# Altium PCB 2023-02-24_PIFHomework_DigitalClock_ThangHo_V1-01.PcbDoc
Units mil, origin at the board's own origin, x right, y up, seen from the top; angles counter-clockwise.
Board outline 5390 x 3175 mil, 2 copper layers (Top Layer, Bottom Layer); 9 components, 19 nets, 85 pads, 0 vias.
Unrouted connection lines stored in the file: 1.
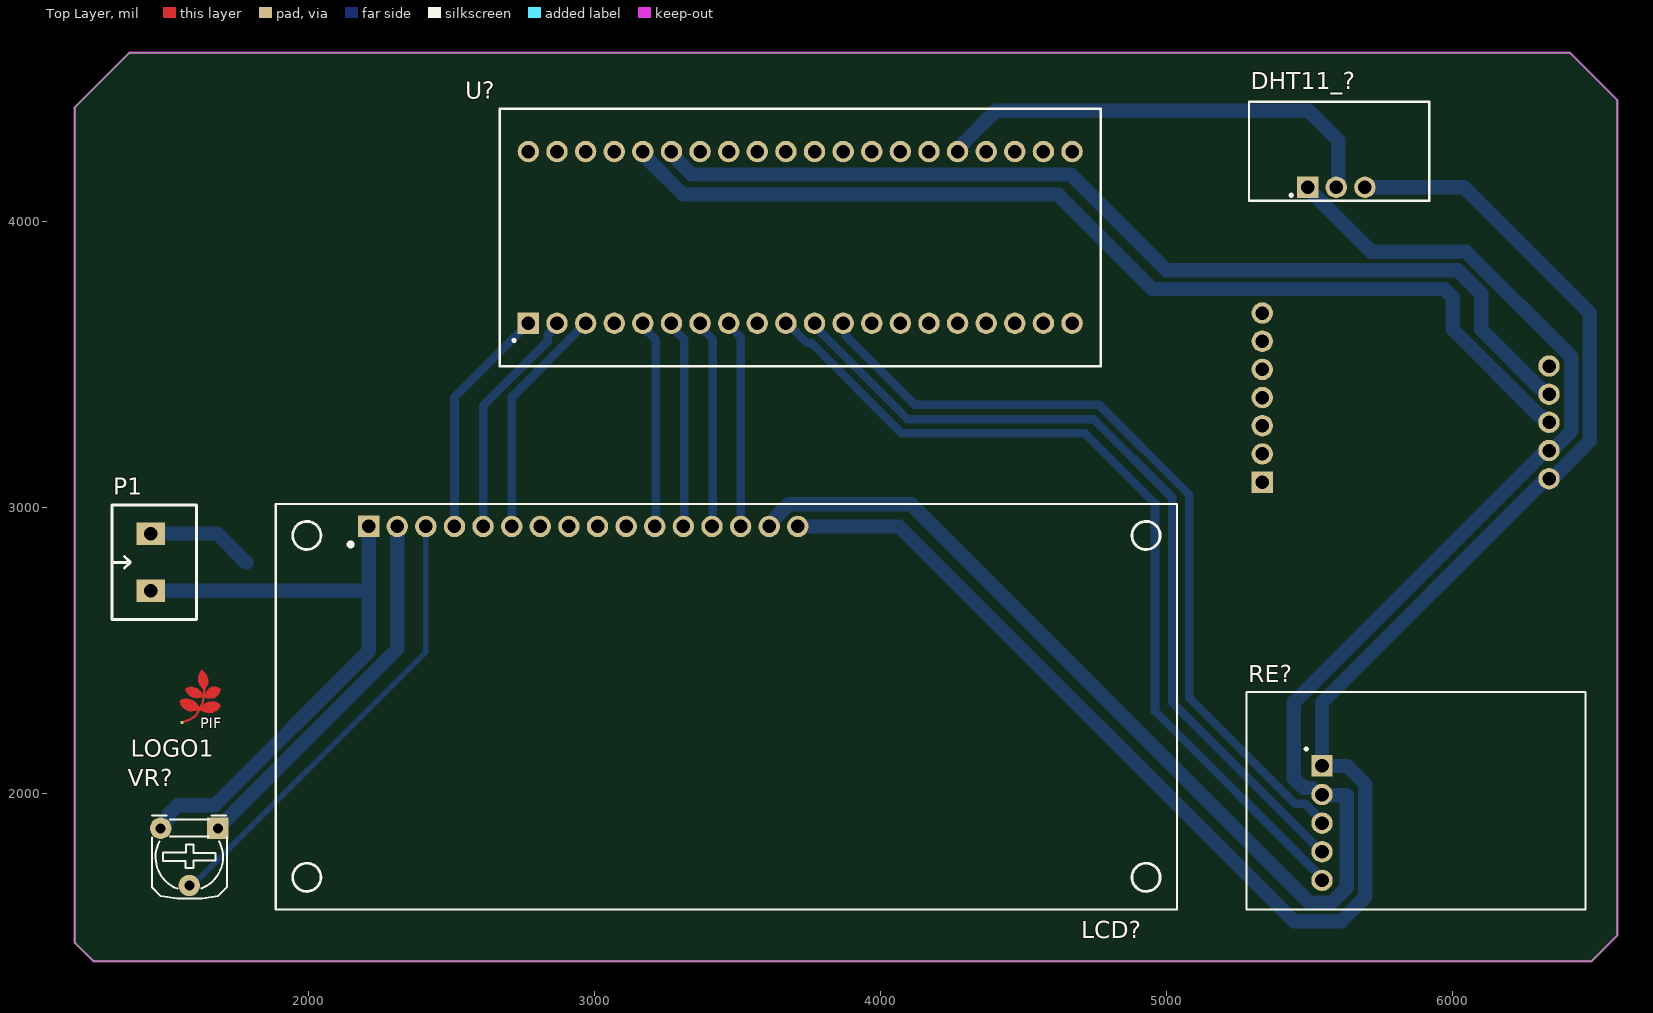
[diagram p0: Top Layer view]
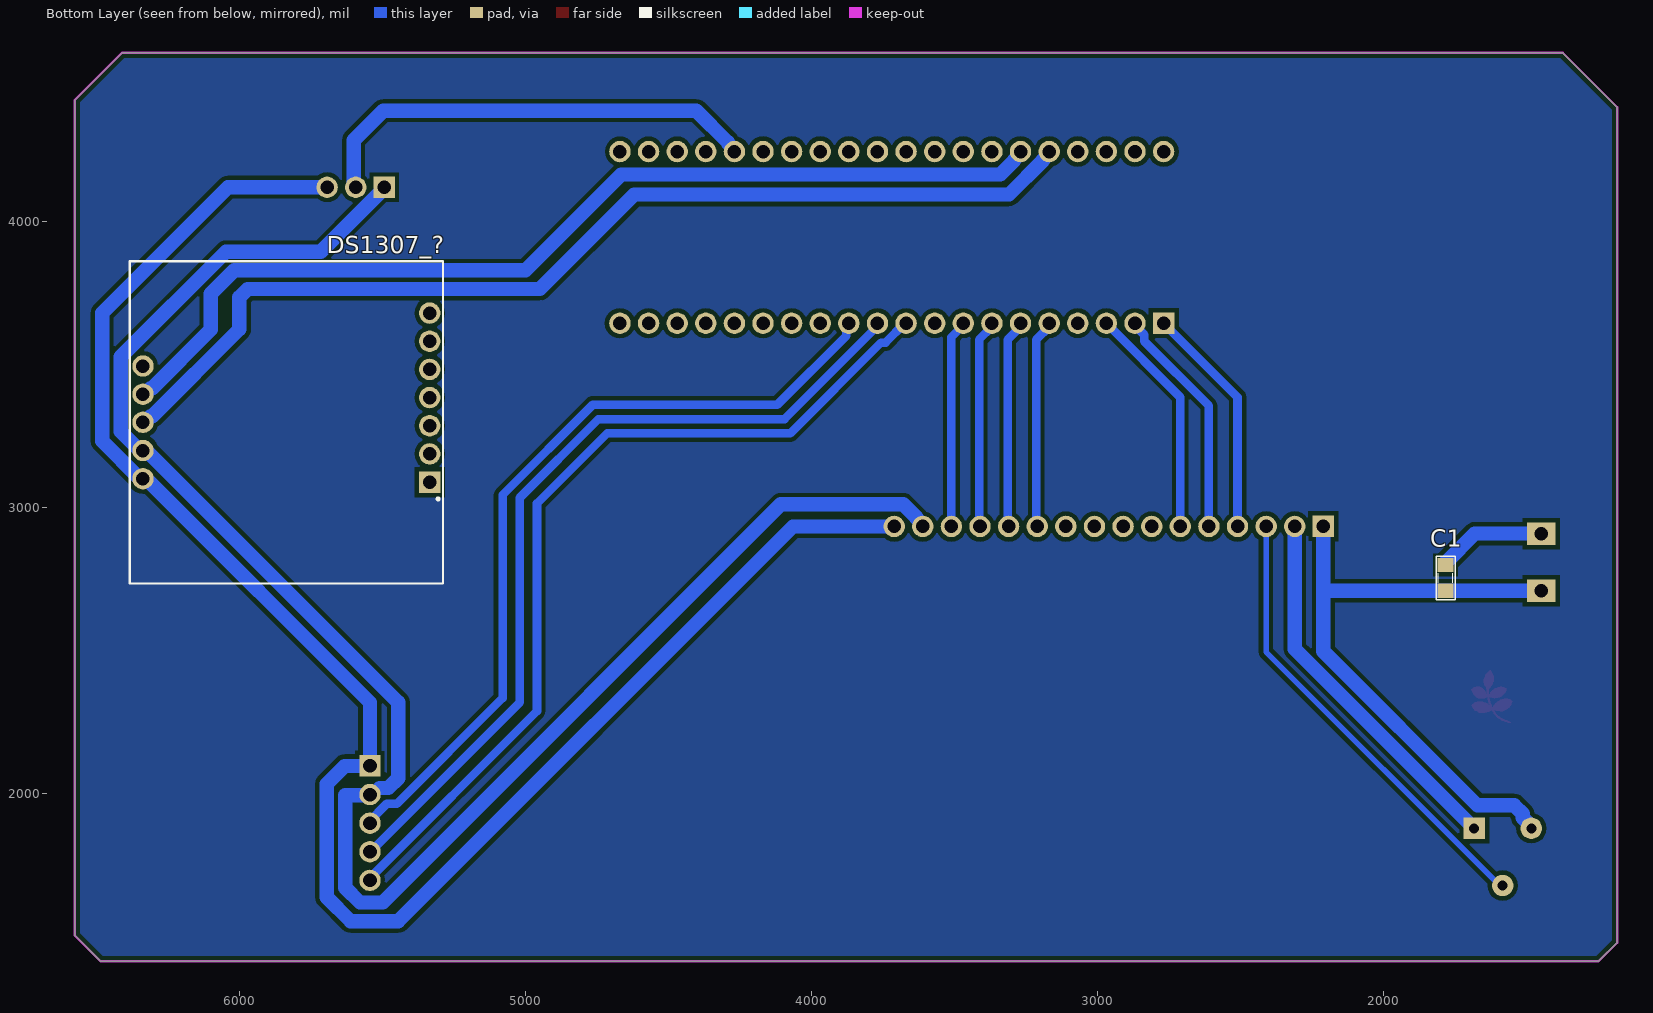
[diagram p1: Bottom Layer view, seen from below]
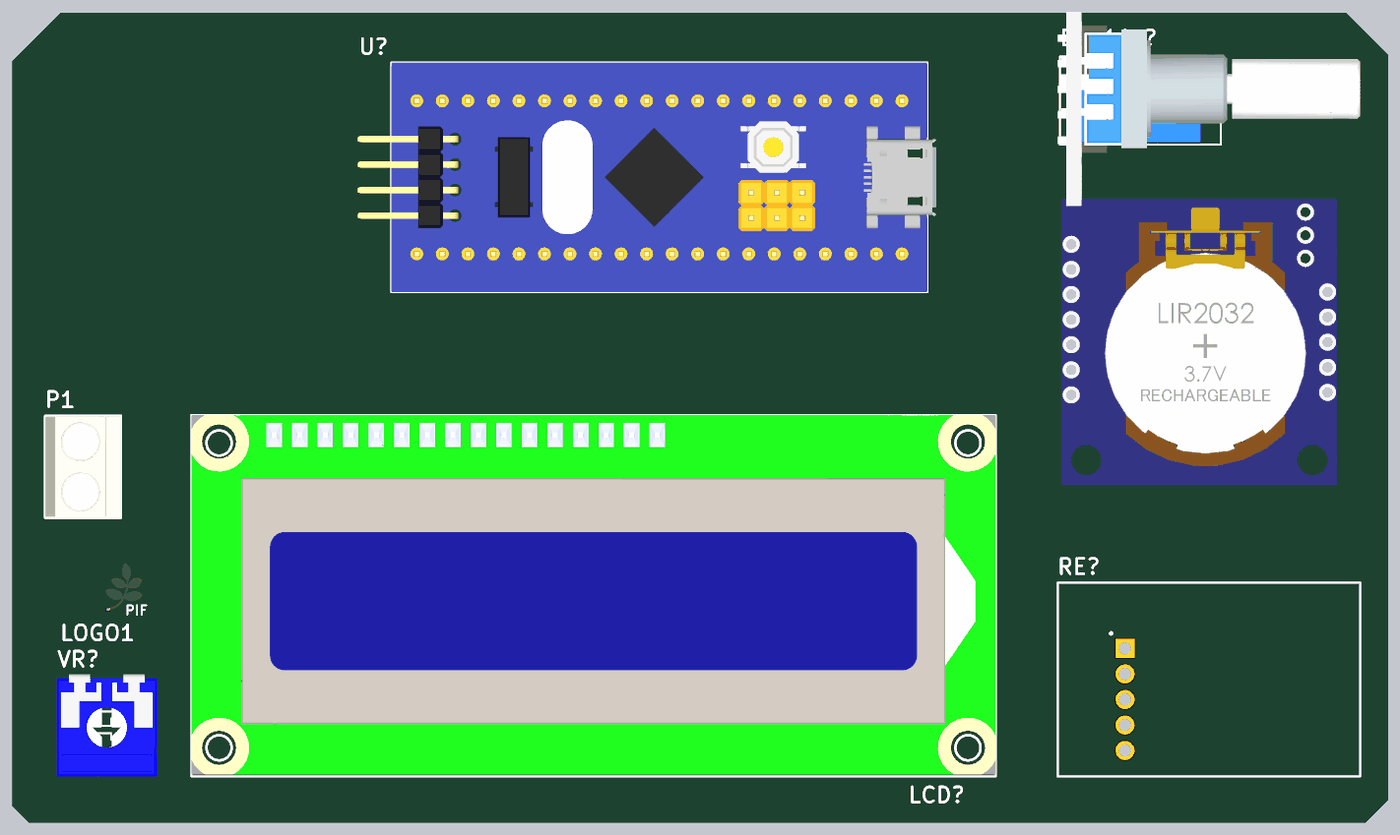
[diagram p2: 3D render of the assembled board from above, using the file's embedded part models]

## Layer stack, top to bottom
Top Solder: solder mask 0.4, Solder Resist, Dk 3.5
Top Layer: signal copper 1.4
Dielectric 1: dielectric 12.6, FR-4, Dk 4.8
Bottom Layer: signal copper 1.4
Bottom Solder: solder mask 0.4, Solder Resist, Dk 3.5

## Board outline
1250,1415 1185,1480 1185,4400 1375,4590 6410,4590 6575,4425 6575,1505 6485,1415

## Design rules (kind name [scope] priority, off if disabled: settings)
Clearance [All] p1: gap=15 ignorepadtopadclearanceinfootprint=FALSE
PolygonConnect [All] p1: connectstyle=Relief reliefconductorwidth=10 reliefentries=4 polygonreliefangle="90 Angle" airgapwidth=10
RoutingVias [All] p1: holewidth=31.5 width=59.06 viastyle="Through Hole" minholewidth=31.5 minwidth=59.06 maxholewidth=31.5 maxwidth=59.06
SolderMaskExpansion [All] p1: expansion=4 istentingtop=FALSE
Width [All] p1: maxlimit=50 minlimit=20 preferedwidth=30
30 further rules are at their usual default settings.

## Components (designator, comment, footprint, x,y, rotation, side; value= is the part's Value field where it differs from the comment)
C1 "Cap Non-Pol SMD" CAP-SM-0805 1785,2710 r90 bottom value=1uF
DHT11_? "N/A" DHT11 5589.53,4120 r0 top
DS1307_? "N/A" DS1307 5835.98,3385.28 r90 bottom
LCD? "N/A" LCD1602 1887.27,3013.74 r0 top
LOGO1 "LOGO PIF" "PIF LOGO SMALL TOP" 1750,2439 r0 top
P1 "Domino 2" "DOMINO 2- 5mm" 1450,2810 r90 top
RE? "N/A" Rotary_Encoder 5890,1972.4 r270 top
U? "Bluepill" STM32F103C8T6 3720,3945 r0 top
VR? "10K" "Varistor 1" 1685,1880 r180 top value="VR 10K"

## Footprints (in the part's own frame and the unit in brackets; to place one, negate y for a bottom-side part, rotate by r counter-clockwise, add the part's x,y. Pads: shape width x height; smd on the part's side, far side on the other; paste and mask are expansions set on the pad)
CAP-SM-0805 [mil]
  rect 50x55 smd: 1(0,0) 2(90,0)
  silkscreen extent -32,-34 121,33, body extent 6,-25 84,25, height 31
DHT11 [mm]
  rect 1.9x1.9 hole 1.2: 1(-2.44,0)
  round 1.9 hole 1.2: 2(0.1,0) 3(2.64,0)
  silkscreen extent -7.64,-1.2 8.36,7.6, body extent -7.64,-0.95 8.36,7.55, height 4.61
"DOMINO 2- 5mm" [mm]
  rect 2x2.5 hole 1.2: 1(-2.54,0) 2(2.54,0)
  silkscreen extent -5.08,-4.08 5.08,3.43, body extent -5,-4.07 5,3.43, height 10
DS1307 [mm]
  rect 1.9x1.9 hole 1.2: 1(-7.5,-12.725)
  round 1.9 hole 1.2: 2(-5,-12.725) 3(-2.5,-12.725) 4(0,-12.725) 5(2.5,-12.725) 6(5,-12.725) 7(7.5,-12.725) 8(2.8,12.725) 9(0.3,12.725) 10(-2.2,12.725) 11(-4.7,12.725) 12(-7.2,12.725) 12(-7.2,12.725)
  silkscreen extent -16.5,-13.9 12.1,13.9, body extent -16.45,-13.77 12.05,13.73, height 2.59
LCD1602 [mm]
  rect 1.9x1.9 hole 1.2: 1(8.24,-2)
  round 1.9 hole 1.2: 2(10.78,-2) 3(13.32,-2) 4(15.86,-2) 5(18.4,-2) 6(20.94,-2) 7(23.48,-2) 8(26.02,-2) 9(28.56,-2) 10(31.1,-2) 11(33.64,-2) 12(36.18,-2) 13(38.72,-2) 14(41.26,-2) 15(43.8,-2) 16(46.34,-2)
  silkscreen extent 0,-36 80,0, body extent 0,-35.8 80,0, height 11.4
"PIF LOGO SMALL TOP" [mil]
  rect 10x10 smd: 1(-190,-189)
  Top Layer region: -76.29,-64.08 -76.23,-64.06 -71.49,-64.7 -71.45,-64.72 -71.4,-64.72 -66.34,-66.32 -66.33,-66.32 -66.33,-66.32 -61.56,-67.89 -61.49,-67.95 -61.4,-67.97 -55.7,-72.41 -55.64,-72.52 -55.55,-72.6 -55.54,-72.69 -55.5,-72.77 -55.53,-72.89 -55.52,-73.01 -57.42,-78.41 -57.44,-78.43 -57.44,-78.45 -60.94,-86.68 -60.96,-86.71 -60.97,-86.75 -62.87,-89.91 -62.87,-89.91 -62.87,-89.92 -65.41,-94.02 -65.46,-94.06 -65.49,-94.12 -72.46,-100.79 -72.53,-100.82 -72.58,-100.88 -78.58,-104.05 -78.63,-104.05 -78.66,-104.08 -82.46,-105.35 -82.55,-105.34 -82.63,-105.37 -93.4,-105.37 -93.43,-105.36 -93.46,-105.37 -98.86,-104.74 -98.87,-104.73 -98.88,-104.74 -103.31,-104.1 -103.37,-104.07 -103.44,-104.07 -107.24,-102.47 -107.26,-102.44 -107.29,-102.44 -110.76,-100.54 -110.81,-100.48 -110.88,-100.45 -110.93,-100.32 -111.02,-100.22 -111.01,-100.14 -111.04,-100.07 -111.04,-93.43 -111,-93.33 -111,-93.22 -106.56,-83.08 -106.53,-83.05 -106.52,-83.01 -100.82,-74.14 -100.75,-74.09 -100.71,-74.02 -97.24,-71.15 -97.21,-71.14 -97.19,-71.11 -92.76,-68.28 -92.7,-68.27 -92.66,-68.23 -84.43,-65.06 -84.37,-65.06 -84.33,-65.03 -78.93,-64.07 -78.75,-64.11 -78.56,-64.13 -78.55,-64.15 -78.52,-64.16 -78.44,-64.28 -76.36,-64.06
  Top Layer region: -76.29,-64.08 -76.23,-64.06 -71.49,-64.7 -71.45,-64.72 -71.4,-64.72 -66.34,-66.32 -66.33,-66.32 -66.33,-66.32 -61.56,-67.89 -61.49,-67.95 -61.4,-67.97 -55.7,-72.41 -55.64,-72.52 -55.55,-72.6 -55.54,-72.69 -55.5,-72.77 -55.53,-72.89 -55.52,-73.01 -57.42,-78.41 -57.44,-78.43 -57.44,-78.45 -60.94,-86.68 -60.96,-86.71 -60.97,-86.75 -62.87,-89.91 -62.87,-89.91 -62.87,-89.92 -65.41,-94.02 -65.46,-94.06 -65.49,-94.12 -72.46,-100.79 -72.53,-100.82 -72.58,-100.88 -78.58,-104.05 -78.63,-104.05 -78.66,-104.08 -82.46,-105.35 -82.55,-105.34 -82.63,-105.37 -93.4,-105.37 -93.43,-105.36 -93.46,-105.37 -98.86,-104.74 -98.87,-104.73 -98.88,-104.74 -103.31,-104.1 -103.37,-104.07 -103.44,-104.07 -107.24,-102.47 -107.26,-102.44 -107.29,-102.44 -110.76,-100.54 -110.81,-100.48 -110.88,-100.45 -110.93,-100.32 -111.02,-100.22 -111.01,-100.14 -111.04,-100.07 -111.04,-93.43 -111,-93.33 -111,-93.22 -106.56,-83.08 -106.53,-83.05 -106.52,-83.01 -100.82,-74.14 -100.75,-74.09 -100.71,-74.02 -97.24,-71.15 -97.21,-71.14 -97.19,-71.11 -92.76,-68.28 -92.7,-68.27 -92.66,-68.23 -84.43,-65.06 -84.37,-65.06 -84.33,-65.03 -78.93,-64.07 -78.75,-64.11 -78.56,-64.13 -78.55,-64.15 -78.52,-64.16 -78.44,-64.28 -76.36,-64.06
  Top Layer region: -123.07,-4.91 -122.89,-4.93 -122.87,-4.96 -122.84,-4.97 -118.74,-8.14 -118.72,-8.16 -118.7,-8.17 -115.22,-11.32 -112.06,-13.84 -112.04,-13.89 -111.99,-13.91 -107.89,-18.65 -107.88,-18.68 -107.85,-18.69 -104.35,-23.76 -104.34,-23.83 -104.29,-23.87 -101.76,-30.54 -101.76,-30.57 -101.74,-30.6 -99.54,-39.13 -99.55,-39.19 -99.53,-39.25 -99.19,-47.81 -99.22,-47.88 -99.2,-47.95 -101.11,-56.48 -101.14,-56.53 -101.14,-56.58 -104,-63.25 -104.02,-63.26 -104.02,-63.29 -107.19,-69.29 -107.2,-69.3 -107.2,-69.31 -110.03,-74.08 -110.08,-74.11 -110.1,-74.16 -112.97,-77.33 -112.98,-77.34 -112.98,-77.35 -113.01,-77.36 -113.02,-77.38 -113.18,-77.43 -113.34,-77.51 -113.35,-77.5 -113.37,-77.51 -113.39,-77.5 -113.41,-77.51 -113.57,-77.43 -113.73,-77.37 -113.74,-77.35 -113.75,-77.35 -113.76,-77.33 -113.78,-77.31 -125.48,-63.38 -125.48,-63.38 -125.48,-63.38 -128.65,-59.58 -128.67,-59.51 -128.73,-59.45 -130.96,-54.39 -130.96,-54.34 -130.99,-54.3 -132.89,-47 -132.88,-46.96 -132.91,-46.92 -133.54,-40.28 -133.52,-40.23 -133.54,-40.18 -132.57,-29.42 -132.56,-29.4 -132.57,-29.37 -131.3,-22.07 -131.28,-22.04 -131.28,-22 -129.38,-16.3 -129.35,-16.27 -129.35,-16.23 -127.16,-11.8 -125.89,-8.98 -125.87,-8.96 -125.87,-8.93 -123.63,-5.13 -123.6,-5.1 -123.6,-5.07 -123.44,-4.98 -123.3,-4.88 -123.27,-4.88 -123.24,-4.86
  Top Layer region: -155.42,-64.71 -155.38,-64.7 -149.38,-65.67 -149.35,-65.68 -149.32,-65.68 -143.92,-67.25 -143.88,-67.28 -143.82,-67.28 -138.12,-70.15 -138.1,-70.17 -138.08,-70.18 -131.98,-74.08 -131.96,-74.1 -131.94,-74.1 -129.07,-76.3 -129.04,-76.36 -128.98,-76.4 -127.74,-77.95 -125.89,-79.48 -125.85,-79.55 -125.79,-79.59 -124.24,-81.8 -122.36,-83.98 -122.34,-84.02 -122.31,-84.04 -120.72,-86.57 -118.52,-89.72 -118.52,-89.74 -118.5,-89.75 -116.6,-92.92 -116.58,-93.07 -116.53,-93.2 -116.54,-93.23 -116.53,-93.26 -117.16,-98.96 -117.18,-98.99 -117.17,-99.02 -117.28,-99.17 -117.36,-99.32 -117.4,-99.33 -117.42,-99.36 -118.98,-100.33 -119.1,-100.35 -119.19,-100.4 -121.39,-100.7 -126.71,-102.29 -126.73,-102.28 -126.75,-102.29 -130.88,-103.23 -130.89,-103.23 -130.89,-103.23 -135.62,-104.2 -135.68,-104.19 -135.73,-104.21 -139.53,-104.21 -139.55,-104.2 -139.58,-104.21 -148.88,-103.47 -148.95,-103.44 -149.02,-103.44 -154.09,-101.54 -154.11,-101.52 -154.14,-101.52 -161.74,-97.72 -161.79,-97.66 -161.86,-97.64 -167.56,-92.57 -167.58,-92.52 -167.63,-92.5 -172.06,-86.8 -172.07,-86.77 -172.09,-86.76 -174.92,-82.32 -174.93,-82.28 -174.97,-82.24 -177.2,-76.84 -177.2,-76.8 -177.22,-76.77 -178.49,-72.04 -178.47,-71.89 -178.48,-71.73 -178.44,-71.69 -178.44,-71.63 -178.37,-71.58 -178.38,-71.49 -178.36,-71.47 -178.36,-71.45 -178.23,-71.32 -178.11,-71.18 -174.94,-69.61 -172.81,-68.55 -172.8,-68.55 -172.79,-68.54 -168.06,-66.34 -168.01,-66.34 -167.97,-66.31 -161.63,-64.71 -161.56,-64.72 -161.5,-64.69 -155.47,-64.69
  Top Layer region: -170.52,-106.31 -170.47,-106.3 -163.83,-107.57 -163.79,-107.6 -163.74,-107.59 -157.07,-110.13 -157.04,-110.16 -156.99,-110.17 -151.3,-113.63 -147.84,-115.53 -147.82,-115.55 -147.79,-115.56 -144.62,-117.79 -144.6,-117.82 -144.57,-117.83 -141.41,-120.66 -141.39,-120.7 -141.35,-120.72 -135.32,-128.02 -135.31,-128.04 -135.29,-128.05 -129.59,-135.95 -129.57,-136.04 -129.51,-136.12 -129.52,-136.19 -129.49,-136.27 -129.51,-136.31 -129.5,-136.35 -129.55,-136.43 -129.56,-136.53 -132.97,-142.69 -132.67,-144.41 -132.7,-144.55 -132.69,-144.69 -132.74,-144.74 -132.76,-144.81 -132.88,-144.89 -132.97,-144.99 -140.57,-148.49 -140.66,-148.49 -140.73,-148.54 -155,-150.44 -155.03,-150.43 -155.07,-150.44 -161.7,-150.44 -161.75,-150.42 -161.8,-150.43 -166.87,-149.46 -166.9,-149.44 -166.94,-149.44 -173.28,-147.24 -173.32,-147.21 -173.37,-147.2 -177.8,-144.67 -177.82,-144.65 -177.84,-144.64 -184.18,-140.21 -184.19,-140.18 -184.23,-140.17 -187.09,-137.64 -187.11,-137.6 -187.15,-137.57 -189.99,-134.07 -189.99,-134.05 -190.02,-134.03 -192.55,-130.23 -192.55,-130.21 -192.57,-130.2 -195.1,-125.77 -195.11,-125.74 -195.12,-125.73 -197.02,-121.63 -197.03,-121.58 -197.05,-121.55 -198.95,-114.88 -198.94,-114.78 -198.97,-114.68 -198.92,-114.58 -198.91,-114.47 -198.82,-114.4 -198.77,-114.31 -193.71,-110.21 -193.63,-110.19 -193.57,-110.13 -188.83,-108.23 -188.81,-108.23 -188.8,-108.22 -183.73,-106.62 -183.65,-106.62 -183.57,-106.59 -183.24,-106.59 -176.62,-106.29 -176.61,-106.3 -176.6,-106.29 -170.57,-106.29
  Top Layer region: -82.86,-115.8 -82.83,-115.79 -78.4,-116.09 -78.37,-116.11 -78.34,-116.1 -74.54,-116.73 -74.51,-116.76 -74.46,-116.75 -70.66,-118.02 -70.64,-118.04 -70.62,-118.04 -68.39,-119 -65.23,-120.26 -65.18,-120.32 -65.1,-120.34 -61,-123.51 -60.99,-123.53 -60.96,-123.54 -54.93,-129.24 -54.88,-129.35 -54.79,-129.45 -54.8,-129.54 -54.76,-129.62 -54.8,-129.73 -54.81,-129.86 -56.41,-133.33 -56.42,-133.34 -56.43,-133.36 -57.99,-136.23 -58.03,-136.26 -58.04,-136.3 -60.58,-139.47 -60.59,-139.48 -60.6,-139.49 -63.12,-142.32 -65.98,-145.81 -66.14,-145.9 -66.3,-146 -67.3,-146.19 -68.55,-147.42 -68.62,-147.45 -68.66,-147.5 -74.02,-150.67 -74.06,-150.67 -74.08,-150.7 -79.15,-152.93 -79.16,-152.93 -79.17,-152.94 -83.93,-154.84 -83.99,-154.84 -84.03,-154.86 -88.76,-155.8 -88.81,-155.79 -88.85,-155.81 -97.71,-156.14 -97.75,-156.13 -97.79,-156.14 -104.12,-155.51 -104.17,-155.48 -104.22,-155.49 -110.56,-153.59 -110.57,-153.58 -110.58,-153.58 -116.91,-151.34 -116.94,-151.32 -116.98,-151.32 -127.11,-146.25 -127.17,-146.18 -127.25,-146.15 -127.29,-146.05 -127.37,-145.97 -127.37,-145.95 -127.38,-145.94 -127.37,-145.85 -127.41,-145.77 -127.37,-145.67 -127.37,-145.56 -123.57,-136.39 -123.49,-136.32 -123.45,-136.22 -120.81,-133.55 -121.07,-131.92 -121.06,-131.9 -121.07,-131.88 -121.02,-131.7 -120.97,-131.51 -120.95,-131.51 -120.95,-131.49 -118.98,-129.13 -119,-129.14 -119.19,-129.16 -119.38,-129.2 -119.39,-129.19 -119.41,-129.19 -119.56,-129.07 -119.72,-128.96 -119.72,-128.94 -119.74,-128.94 -119.76,-128.74 -119.8,-128.55 -119.79,-128.54 -119.79,-128.52 -119.67,-128.37 -119.56,-128.21 -114.19,-124.75 -114.02,-124.71 -113.85,-124.66 -113.82,-124.68 -113.79,-124.67 -113.64,-124.77 -113.63,-124.78 -110.38,-122.84 -110.35,-122.83 -110.33,-122.81 -105.56,-120.58 -105.55,-120.58 -105.54,-120.57 -100.17,-118.37 -100.15,-118.37 -100.14,-118.35 -96.34,-117.09 -96.29,-117.09 -96.25,-117.07 -90.22,-116.1 -90.19,-116.11 -90.16,-116.09 -82.89,-115.79
  Top Layer region: -82.86,-115.8 -82.83,-115.79 -78.4,-116.09 -78.37,-116.11 -78.34,-116.1 -74.54,-116.73 -74.51,-116.76 -74.46,-116.75 -70.66,-118.02 -70.64,-118.04 -70.62,-118.04 -68.39,-119 -65.23,-120.26 -65.18,-120.32 -65.1,-120.34 -61,-123.51 -60.99,-123.53 -60.96,-123.54 -54.93,-129.24 -54.88,-129.35 -54.79,-129.45 -54.8,-129.54 -54.76,-129.62 -54.8,-129.73 -54.81,-129.86 -56.41,-133.33 -56.42,-133.34 -56.43,-133.36 -57.99,-136.23 -58.03,-136.26 -58.04,-136.3 -60.58,-139.47 -60.59,-139.48 -60.6,-139.49 -63.12,-142.32 -65.98,-145.81 -66.14,-145.9 -66.3,-146 -67.3,-146.19 -68.55,-147.42 -68.62,-147.45 -68.66,-147.5 -74.02,-150.67 -74.06,-150.67 -74.08,-150.7 -79.15,-152.93 -79.16,-152.93 -79.17,-152.94 -83.93,-154.84 -83.99,-154.84 -84.03,-154.86 -88.76,-155.8 -88.81,-155.79 -88.85,-155.81 -97.71,-156.14 -97.75,-156.13 -97.79,-156.14 -104.12,-155.51 -104.17,-155.48 -104.22,-155.49 -110.56,-153.59 -110.57,-153.58 -110.58,-153.58 -116.91,-151.34 -116.94,-151.32 -116.98,-151.32 -127.11,-146.25 -127.17,-146.18 -127.25,-146.15 -127.29,-146.05 -127.37,-145.97 -127.37,-145.95 -127.38,-145.94 -127.37,-145.85 -127.41,-145.77 -127.37,-145.67 -127.37,-145.56 -123.57,-136.39 -123.49,-136.32 -123.45,-136.22 -120.81,-133.55 -121.07,-131.92 -121.06,-131.9 -121.07,-131.88 -121.02,-131.7 -120.97,-131.51 -120.95,-131.51 -120.95,-131.49 -118.98,-129.13 -119,-129.14 -119.19,-129.16 -119.38,-129.2 -119.39,-129.19 -119.41,-129.19 -119.56,-129.07 -119.72,-128.96 -119.72,-128.94 -119.74,-128.94 -119.76,-128.74 -119.8,-128.55 -119.79,-128.54 -119.79,-128.52 -119.67,-128.37 -119.56,-128.21 -114.19,-124.75 -114.02,-124.71 -113.85,-124.66 -113.82,-124.68 -113.79,-124.67 -113.64,-124.77 -113.63,-124.78 -110.38,-122.84 -110.35,-122.83 -110.33,-122.81 -105.56,-120.58 -105.55,-120.58 -105.54,-120.57 -100.17,-118.37 -100.15,-118.37 -100.14,-118.35 -96.34,-117.09 -96.29,-117.09 -96.25,-117.07 -90.22,-116.1 -90.19,-116.11 -90.16,-116.09 -82.89,-115.79
  Top Layer region: -123.07,-4.91 -122.89,-4.93 -122.87,-4.96 -122.84,-4.97 -118.74,-8.14 -118.72,-8.16 -118.7,-8.17 -115.22,-11.32 -112.06,-13.84 -112.04,-13.89 -111.99,-13.91 -107.89,-18.65 -107.88,-18.68 -107.85,-18.69 -104.35,-23.76 -104.34,-23.83 -104.29,-23.87 -101.76,-30.54 -101.76,-30.57 -101.74,-30.6 -99.54,-39.13 -99.55,-39.19 -99.53,-39.25 -99.19,-47.81 -99.22,-47.88 -99.2,-47.95 -101.11,-56.48 -101.14,-56.53 -101.14,-56.58 -104,-63.25 -104.02,-63.26 -104.02,-63.29 -107.19,-69.29 -107.2,-69.3 -107.2,-69.31 -110.03,-74.08 -110.08,-74.11 -110.1,-74.16 -112.97,-77.33 -112.98,-77.34 -112.98,-77.35 -113.01,-77.36 -113.02,-77.38 -113.18,-77.43 -113.34,-77.51 -113.35,-77.5 -113.37,-77.51 -113.39,-77.5 -113.41,-77.51 -113.57,-77.43 -113.73,-77.37 -113.74,-77.35 -113.75,-77.35 -113.76,-77.33 -113.78,-77.31 -125.48,-63.38 -125.48,-63.38 -125.48,-63.38 -128.65,-59.58 -128.67,-59.51 -128.73,-59.45 -130.96,-54.39 -130.96,-54.34 -130.99,-54.3 -132.89,-47 -132.88,-46.96 -132.91,-46.92 -133.54,-40.28 -133.53,-40.26 -133.54,-40.23 -133.54,-31 -133.51,-30.94 -133.52,-30.87 -131.29,-22.03 -131.28,-22.02 -131.28,-22 -129.38,-16.3 -129.35,-16.27 -129.35,-16.23 -127.16,-11.8 -125.89,-8.98 -125.87,-8.96 -125.87,-8.93 -123.63,-5.13 -123.6,-5.1 -123.6,-5.07 -123.44,-4.98 -123.3,-4.88 -123.27,-4.88 -123.24,-4.86
  Top Layer region: -155.42,-64.71 -155.38,-64.7 -149.38,-65.67 -149.35,-65.68 -149.32,-65.68 -143.92,-67.25 -143.88,-67.28 -143.82,-67.28 -138.12,-70.15 -138.1,-70.17 -138.08,-70.18 -131.98,-74.08 -131.96,-74.1 -131.94,-74.1 -129.07,-76.3 -129.04,-76.36 -128.98,-76.4 -127.74,-77.95 -125.89,-79.48 -125.85,-79.55 -125.79,-79.59 -124.24,-81.8 -122.36,-83.98 -122.34,-84.02 -122.31,-84.04 -120.72,-86.57 -118.52,-89.72 -118.52,-89.74 -118.5,-89.75 -116.6,-92.92 -116.58,-93.07 -116.53,-93.2 -116.54,-93.23 -116.53,-93.26 -117.16,-98.96 -117.18,-98.99 -117.17,-99.02 -117.28,-99.17 -117.36,-99.32 -117.4,-99.33 -117.42,-99.36 -118.98,-100.33 -119.1,-100.35 -119.19,-100.4 -121.39,-100.7 -126.71,-102.29 -126.73,-102.28 -126.75,-102.29 -130.88,-103.23 -130.89,-103.23 -130.89,-103.23 -135.62,-104.2 -135.68,-104.19 -135.73,-104.21 -139.53,-104.21 -139.55,-104.2 -139.58,-104.21 -148.88,-103.47 -148.95,-103.44 -149.02,-103.44 -154.09,-101.54 -154.11,-101.52 -154.14,-101.52 -161.74,-97.72 -161.79,-97.66 -161.86,-97.64 -167.56,-92.57 -167.58,-92.52 -167.63,-92.5 -172.06,-86.8 -172.07,-86.77 -172.09,-86.76 -174.92,-82.32 -174.93,-82.28 -174.97,-82.24 -177.2,-76.84 -177.2,-76.8 -177.22,-76.77 -178.49,-72.04 -178.47,-71.89 -178.48,-71.73 -178.44,-71.69 -178.44,-71.63 -178.37,-71.58 -178.38,-71.49 -178.36,-71.47 -178.36,-71.45 -178.23,-71.32 -178.11,-71.18 -174.94,-69.61 -172.81,-68.55 -172.8,-68.55 -172.79,-68.54 -168.06,-66.34 -168.01,-66.34 -167.97,-66.31 -161.63,-64.71 -161.56,-64.72 -161.5,-64.69 -155.47,-64.69
  Top Layer region: -170.52,-106.31 -170.47,-106.3 -163.83,-107.57 -163.79,-107.6 -163.74,-107.59 -157.07,-110.13 -157.04,-110.16 -156.99,-110.17 -151.3,-113.63 -147.84,-115.53 -147.82,-115.55 -147.79,-115.56 -144.62,-117.79 -144.6,-117.82 -144.57,-117.83 -141.41,-120.66 -141.39,-120.7 -141.35,-120.72 -135.32,-128.02 -135.31,-128.04 -135.29,-128.05 -129.59,-135.95 -129.57,-136.04 -129.51,-136.12 -129.52,-136.19 -129.49,-136.27 -129.51,-136.31 -129.5,-136.35 -129.55,-136.43 -129.56,-136.53 -132.97,-142.69 -132.67,-144.41 -132.7,-144.55 -132.69,-144.69 -132.74,-144.74 -132.76,-144.81 -132.88,-144.89 -132.97,-144.99 -140.57,-148.49 -140.66,-148.49 -140.73,-148.54 -155,-150.44 -155.03,-150.43 -155.07,-150.44 -161.7,-150.44 -161.75,-150.42 -161.8,-150.43 -166.87,-149.46 -166.9,-149.44 -166.94,-149.44 -173.28,-147.24 -173.32,-147.21 -173.37,-147.2 -177.8,-144.67 -177.82,-144.65 -177.84,-144.64 -184.18,-140.21 -184.19,-140.18 -184.23,-140.17 -187.09,-137.64 -187.11,-137.6 -187.15,-137.57 -189.99,-134.07 -189.99,-134.05 -190.02,-134.03 -192.55,-130.23 -192.55,-130.21 -192.57,-130.2 -195.1,-125.77 -195.11,-125.74 -195.12,-125.73 -197.02,-121.63 -197.03,-121.58 -197.05,-121.55 -198.95,-114.88 -198.94,-114.78 -198.97,-114.68 -198.92,-114.58 -198.91,-114.47 -198.82,-114.4 -198.77,-114.31 -193.71,-110.21 -193.63,-110.19 -193.57,-110.13 -188.83,-108.23 -188.81,-108.23 -188.8,-108.22 -183.73,-106.62 -183.65,-106.62 -183.57,-106.59 -183.24,-106.59 -176.62,-106.29 -176.61,-106.3 -176.6,-106.29 -170.57,-106.29
  Top Layer lines w7.87: -169.53,-181.33 -164.57,-179.7 ; -169.53,-181.33 -190.97,-189.03 -169.53,-181.33 ; -169.53,-181.33 -164.57,-179.7 ; -164.57,-179.7 -160.73,-177.5 ; -164.57,-179.7 -160.73,-177.5 ; -160.73,-177.5 -153.03,-173.1 ; -160.73,-177.5 -153.03,-173.1 ; -153.03,-173.1 -146.97,-168.13 ; -153.03,-173.1 -146.97,-168.13 ; -146.97,-168.13 -144.07,-165.43 ; -146.97,-168.13 -144.07,-165.43 ; -144.07,-165.43 -140.33,-161.17 ; -144.07,-165.43 -140.33,-161.17 ; -140.33,-161.17 -137.67,-157.17 ; -140.33,-161.17 -137.67,-157.17 ; -137.67,-157.17 -134.73,-152.1 ; -137.67,-157.17 -134.73,-152.1 ; -134.73,-152.1 -128.07,-139.57 ; -134.73,-152.1 -128.07,-139.57 ; -128.07,-139.57 -124.07,-132.1 ; -128.07,-139.57 -124.07,-132.1 ; -124.07,-132.1 -120.07,-122.5 ; -124.07,-132.1 -120.07,-122.5 ; -120.07,-122.5 -119.27,-119.83 ; -120.07,-122.5 -119.27,-119.83 ; -119.27,-119.83 -116.37,-109.67 ; -119.27,-119.83 -116.37,-109.67 ; -116.37,-109.67 -115.3,-104.07 ; -116.37,-109.67 -115.3,-104.07 ; -115.3,-104.07 -113.97,-94.73 ; -115.3,-104.07 -113.97,-94.73 ; -113.97,-94.73 -113.43,-88.33 ; -113.97,-94.73 -113.43,-88.33 ; -113.43,-88.33 -112.9,-82.47 ; -113.43,-88.33 -112.9,-82.47 ; -113.17,-75.53 -113.7,-72.07 -113.17,-75.53 ; -113.17,-75.53 -112.9,-82.47 ; -113.17,-75.53 -112.9,-82.47
Rotary_Encoder [mm]
  rect 1.9x1.9 hole 1.2: 1(-3.19,-8.8)
  round 1.9 hole 1.2: 2(-0.65,-8.8) 3(1.89,-8.8) 4(4.43,-8.8) 5(6.97,-8.8)
  silkscreen extent -9.75,-15.5 9.55,14.6, body extent -9.76,-15.5 9.56,14.57, height 28.71
STM32F103C8T6 [mm]
  rect 1.9x1.9 hole 1.2: 1(-24.13,-7.62)
  round 1.9 hole 1.2: 2(-21.59,-7.62) 3(-19.05,-7.62) 4(-16.51,-7.62) 5(-13.97,-7.62) 6(-11.43,-7.62) 7(-8.89,-7.62) 8(-6.35,-7.62) 9(-3.81,-7.62) 10(-1.27,-7.62) 11(1.27,-7.62) 12(3.81,-7.62) 13(6.35,-7.62) 14(8.89,-7.62) 15(11.43,-7.62) 16(13.97,-7.62) 17(16.51,-7.62) 18(19.05,-7.62) 19(21.59,-7.62) 20(24.13,-7.62) 21(24.13,7.62) 22(21.59,7.62) 23(19.05,7.62) 24(16.51,7.62) 25(13.97,7.62) 26(11.43,7.62) 27(8.89,7.62) 28(6.35,7.62) 29(3.81,7.62) 30(1.27,7.62) 31(-1.27,7.62) 32(-3.81,7.62) 33(-6.35,7.62) 34(-8.89,7.62) 35(-11.43,7.62) 36(-13.97,7.62) 37(-16.51,7.62) 38(-19.05,7.62) 39(-21.59,7.62) 40(-24.13,7.62)
  silkscreen extent -26.67,-11.43 26.67,11.43, body extent -30,-11.43 27.56,11.43, height 12.31
"Varistor 1" [mil] "Resistor Variable"
  rect 75x75 hole 35: 1(0,0)
  round 75 hole 35: 2(100,200) 3(200,0)
  silkscreen extent -31,-44 231,246, body extent -68,-117 326,285, height 165

## Part data
C1: "Capacitor"
DHT11_?: library part DHT11, "Temperature Humidity Sensor 16bi", Manufacturer="UNIVERSAL-SOLDER Electronics Ltd", Package=Bulk, Package / Case="3-SIP Module", Voltage - Supply="3.5V ~ 5.5V", Accuracy="±5% RH", ComponentLink1Description=Datasheet, ComponentLink1URL=https://www.mouser.com/datasheet/2/758/DHT11-Technical-Data-Sheet-Translated-Version-1143054.pdf, ComponentLink2Description=Thegioiic, ComponentLink2URL=https://www.thegioiic.com/dht11-mach-cam-bien-nhiet-do-va-do-am-den, Mounting Type="Through Hole", Output=16b, Output Type=Digital, Product Status=Active, Sensor Type="Humidity, Temperature"
DS1307_?: library part DS1307, "IC RTC CLOCK/CALENDAR I2C 8DIP", Current - Timekeeping (Max)="200µA @ 5V", Manufacturer="Analog Devices Inc./Maxim Integrated", Operating Temperature="0°C ~ 70°C", Package=Tube, Package / Case="8-DIP (0.300\", 7.62mm)", Supplier Device Package=8-PDIP, Voltage - Supply="4.5V ~ 5.5V", Voltage - Supply, Battery="2V ~ 3.5V", Base Product Number=DS1307, ComponentLink1Description=Datasheet, ComponentLink1URL=https://www.sparkfun.com/datasheets/Components/DS1307.pdf, ComponentLink2Description=Thegioiic, ComponentLink2URL=https://www.thegioiic.com/ds1307-ic-rtc-clock-calendar-56b-8-dip, Date Format=YY-MM-DD-dd, Features="Leap Year, NVSRAM, Square Wave Output", Interface="I²C, 2-Wire Serial", Memory Size=56B, Mounting Type="Through Hole", Product Status=Obsolete, Time Format="HH:MM:SS (12/24 hr)", Type=Clock/Calendar
LCD?: library part LCD1602, "BLUE LCD 1602 2x16 Character Mat", Background Color=Blue, Manufacturer="UNIVERSAL-SOLDER Electronics Ltd", Operating Temperature="-20°C ~ 70°C", Package=Bag, Text Color=White, Voltage - Supply="4.5V ~ 5.5V", Backlight="LED - Yellow/Green", Character Format="5 x 8 Dots", Character Size="5.15mm H x 2.90mm W", ComponentLink1Description=Hshop, ComponentLink1URL=https://hshop.vn/products/lcd-text-lcd1602-xanh-lo, ComponentLink2Description=Datasheet, ComponentLink2URL=https://www.waveshare.com/datasheet/LCD_en_PDF/LCD1602.pdf, Controller Type=HD44780, Display Format="16 x 2", Display Type="STN - Super-Twisted Nematic", Dot Size="0.55mm W x 0.65mm H", Number of Characters=32, Outline L x W x H="80.00mm x 36.00mm x 11.00mm", Product Status=Active, Viewing Area="55.70mm L x 11.00mm W"
P1: "Domino, 2-Pin", LatestRevisionDate=17-Jul-2002, LatestRevisionNote="Re-released for DXP Platform.", Publisher="Altium Limited"
RE?: library part "Rotary Encoder", "ROTARY ENCODER MECHANICAL 16PPR", Manufacturer="CUI Devices", Voltage - Supply=5V, Actuator Type="6mm Dia Flatted End", Built in Switch=Yes, ComponentLink1Description=Hshop, ComponentLink1URL=https://hshop.vn/products/mach-volume-xoay-encoder, ComponentLink2Description=Datasheet, ComponentLink2URL=http://handsontec.com/dataspecs/module/Rotary%20Encoder.pdf, Detent=Yes, Encoder Type=Mechanical, Mounting Type="Panel, PCB Through Hole", Orientation=Vertical, Output Type="Quadrature (Incremental)", Product Status=Obsolete, Pulses per Revolution=16, Rotational Life (Cycles Min)=500K, Series=RME12, Termination Style="PC Pin"
U?: library part STM32F103C8T6, "STM32F103C8T6, mbed-Enabled Development Bluepill STM32F1 ARM® Cortex®-M3 MCU 32-Bit Embedded Evaluation Board", Manufacturer=STMicroelectronics, Operating Temperature="40°C ~ 85°C (TA)", Package / Case=48-LQFP, Voltage - Supply (Vcc/Vdd)="2V ~ 3.6V", Base Product Number=STM32F103, ComponentLink1Description=MPU, ComponentLink1URL=https://www.thegioiic.com/stm32f103c8t6, ComponentLink2Description="Kit Bluepill", ComponentLink2URL=https://hshop.vn/products/kit-ra-chon-stm32f103c8t6, ComponentLink3Description=Datasheet, ComponentLink3URL=https://www.st.com/resource/en/datasheet/cd00161566.pdf, Connectivity="CANbus, I²C, IrDA, LINbus, SPI, UART/USART, USB", Core Processor="ARM® Cortex®-M3", Core Size="32-Bit Single-Core", Data Converters="A/D 10x12b", Mounting Type="Surface Mount", Number of I/O=37, Oscillator Type=Internal, Peripherals="DMA, Motor Control PWM, PDR, POR, PVD, PWM, Temp Sensor, WDT", Program Memory Size="64KB (64K x 8)", Program Memory Type=FLASH, RAM Size="20K x 8", Series=STM32F1, Speed=72MHz
VR?: library part "Var Resistor", "Var Resistor"

## Nets (pads, with @x,y where several pads share a name; then routed paths per layer and width w, separated by ;. In a path a pad name is that pad's centre, name@x,y a point inside that pad or via, vN(x,y) a via of type N, cw(c..) or ccw(c..) an arc to the next point about the centre after c; other vN are vias at no path point)
3V3: 
5V: LCD?.2 VR?.1 | length 1314.6
  Bottom Layer w50: VR?.1 2311.68,2506.68 LCD?.2
+5: DHT11_?.1 DS1307_?.11 LCD?.15 RE?.2 | length 6204
  Bottom Layer w50: LCD?.15 3611.68,2941.71 3634.28,2964.31 3634.28,2967.06 3679.62,3012.4 4107.6,3012.4 5447.5,1672.5 5499.41,1620.59 5578.54,1620.59 5629.92,1671.97 5629.92,1995 5555.51,1995 5552.52,1997.99 RE?.2 RE?.2@5537.01,1997.99 ; DHT11_?.1@5492,4118.54 5715.54,3895 6046.94,3895 6414.37,3527.57 6414.37,3266.6 6348.01,3200.24 DS1307_?.11 6325.24,3200.24 5445,2320 5445,2055 5479.38,2020.62 5509.38,2020.62
GND: C1.1 DHT11_?.3 DS1307_?.12 LCD?.1 LCD?.16 P1.1 RE?.1 VR?.3 | length 8287.9
  Bottom Layer w50: P1.1 C1.1@1772.5,2710 ; VR?.3 1485,1886.76 1515,1916.76 1515,1930.71 1544.29,1960 1673.08,1960 2211.68,2498.61 2211.68,2710 ; C1.1 2211.68,2710 ; LCD?.1 2211.68,2710 ; LCD?.16 4065,2935 5444.41,1555.59 5611.5,1555.59 5694.92,1639.01 5694.92,2035.08 5632.01,2097.99 RE?.1 5543.54,2319.42 6313.53,3089.41 6317.86,3089.41 6330.26,3101.81 6336.97,3101.81 6348.01,3101.81 6479.37,3233.18 6479.37,3680.63 6040,4120 DHT11_?.3@5700,4120
NetDHT11_?_2: DHT11_?.2 U?.25 | length 1604.7
  Bottom Layer w50: U?.25 4270,4251.71 4292.6,4274.31 4292.6,4277.06 4402.94,4387.4 5497.6,4387.4 5600,4285 5600,4126.54 DHT11_?.2
NetDS1307_?_9: DS1307_?.9 U?.35 | length 3497
  Bottom Layer w50: U?.35 3270,4238.29 3292.6,4215.69 3292.6,4212.94 3340.54,4165 4665,4165 5000,3830 6018.08,3830 6100,3748.08 6100,3623.02 6304.91,3418.11 6309.23,3418.11 6330.26,3397.09 DS1307_?.9
NetDS1307_?_10: DS1307_?.10 U?.36 | length 3629.6
  Bottom Layer w50: U?.36 3170,4238.29 3192.6,4215.69 3192.6,4212.94 3310.54,4095 4620,4095 4950,3765 5970.71,3765 6000,3735.71 6000,3624.59 6304.91,3319.68 6309.23,3319.68 6330.26,3298.66 DS1307_?.10
NetLCD?_3: LCD?.3 VR?.2 | length 1603.5
  Bottom Layer w20: VR?.2 1595.36,1680 2411.68,2496.33 LCD?.3
NetLCD?_4: LCD?.4 U?.1 | length 817
  Bottom Layer w30: LCD?.4 2511.68,3386.68 U?.1
NetLCD?_5: LCD?.5 U?.2 | length 817
  Bottom Layer w30: LCD?.5 2611.68,3356.68 2837.4,3582.4 2837.4,3605 2870,3637.6 U?.2
NetLCD?_6: LCD?.6 U?.3 | length 817
  Bottom Layer w30: LCD?.6 2711.68,3386.68 U?.3
NetLCD?_11: LCD?.11 U?.5 | length 730
  Bottom Layer w30: U?.5 3170,3632.88 3215,3587.88 3215,2938.32 LCD?.11
NetLCD?_12: LCD?.12 U?.6 | length 730
  Bottom Layer w30: U?.6 3270,3632.88 3315,3587.88 3315,2938.32 LCD?.12
NetLCD?_13: LCD?.13 U?.7 | length 730
  Bottom Layer w30: U?.7 3370,3632.88 3415,3587.88 3415,2938.32 LCD?.13
NetLCD?_14: LCD?.14 U?.8 | length 727.3
  Bottom Layer w30: U?.8 3470,3638.47 3511.68,3596.78 LCD?.14
NetRE?_3: RE?.3 U?.12 | length 2836.2
  Bottom Layer w30: U?.12 3878.57,3636.43 3878.57,3601.43 4120,3360 4765,3360 5080,3045 5080,2335 5449.41,1965.59 5484.92,1965.59 RE?.3@5548.03,1902.48
NetRE?_4: RE?.4 U?.11 | length 2972.3
  Bottom Layer w30: U?.11 3770,3635 4095,3310 4745,3310 5020,3035 5020,2320 5542.01,1797.99 RE?.4 RE?.4@5552.52,1797.99
NetRE?_5: RE?.5 U?.10 | length 3107.2
  Bottom Layer w30: U?.10 3674.68,3645 3742.08,3577.6 3757.4,3577.6 4075,3260 4715,3260 4960,3015 4960,2290 RE?.5@5547.78,1702.22
VCC: C1.2 P1.2 | length 376.4
  Bottom Layer w50: P1.2 1682.5,2910 1782.5,2810 C1.2@1785,2810
pads on no net: DS1307_?.1 DS1307_?.2 DS1307_?.3 DS1307_?.4 DS1307_?.5 DS1307_?.6 DS1307_?.7 DS1307_?.8 LCD?.7 LCD?.8 LCD?.9 LCD?.10 LOGO1.1 U?.4 U?.9 U?.13 U?.14 U?.15 U?.16 U?.17 U?.18 U?.19 U?.20 U?.21 U?.22 U?.23 U?.24 U?.26 U?.27 U?.28 U?.29 U?.30 U?.31 U?.32 U?.33 U?.34 U?.37 U?.38 U?.39 U?.40

## Polygon pours and split planes (outlines as drawn)
no net on Bottom Layer "NONET_L02_P000" (solid, pour order 0): 1250,1415 1185,1480 1185,4400 1375,4590 6410,4590 6575,4425 6575,1505 6485,1415

## Keep-outs
Keep-Out Layer:
  the board outline again, w7.87

## Text inside footprints (layer, text, board x,y; h text height)
LOGO1: Top Overlay "PIF" at 1623.43,2229.47 h37.5